# EAGLE board Netzteil-Treiber2 (EAGLE 6.2)
Treiberstufe für Linearen Spannungs- und Stomregler mit OP
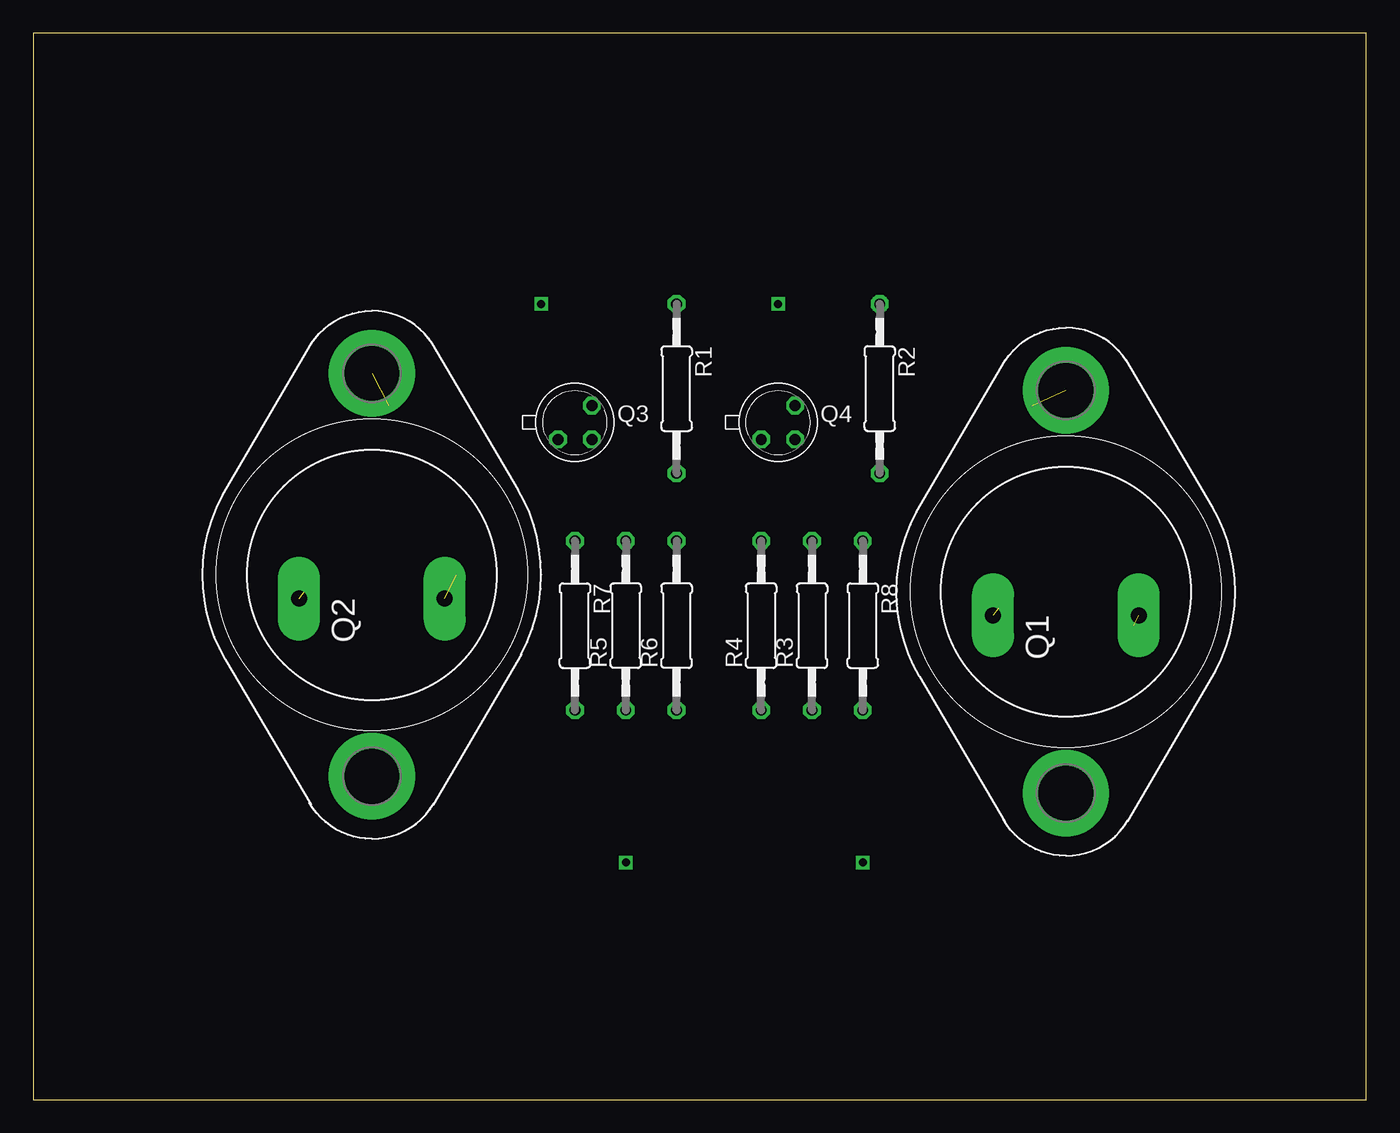
[diagram p0: board, top side]
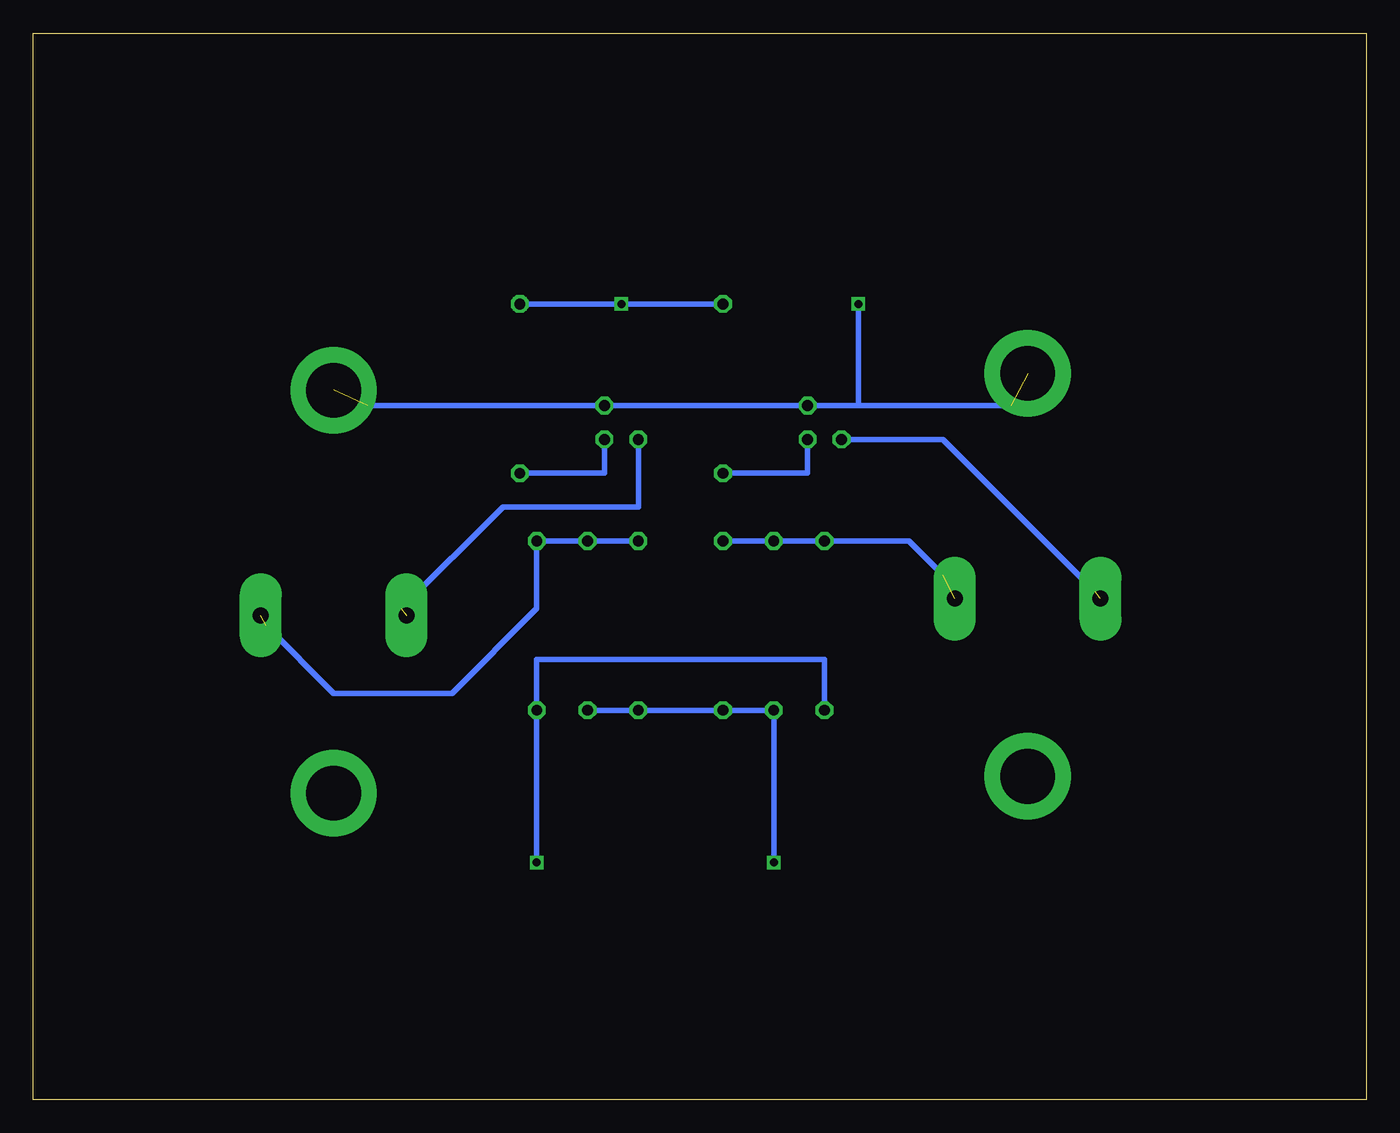
[diagram p1: board, bottom side, seen from below]

Size 100 x 80 mm. Coordinates in mm from the lower left corner, seen from the top.
Outline: 0,0 100,0 100,80 0,80 0,0
Copper layers (1*16): Top 0.035mm / dielectric 1.5mm / Bottom 0.035mm
Design rules: minimum track width 10mil, minimum drill 24mil, track to track 8mil, track to pad 8mil, pad to pad 8mil, via to via 8mil, smd to smd 8mil, copper to edge 40mil, drill to drill 8mil, minimum pad ring 10mil, minimum via ring 8mil, stop-mask expansion 4mil, vias tented up to drill 0mil, thermal gap 10mil

## Footprints (pad centres in the part's own frame; a part is rotated, then mirrored left to right if it is on the bottom)
TO3 = drill 1.194 pad 3.15 long: B -1.778,5.461; E -1.778,-5.461 | drill 4.115 pad 6.477: C 15.113,0; C/ -15.113,0
TO18 = drill 0.813 octagon: 1 -1.27,-1.27; 2 1.27,-1.27; 3 1.27,1.27
0207/12 = drill 0.813 octagon: 1 -6.35,0; 2 6.35,0

## Placement (x,y rotation side)
Q1  2N3055  [TO3]  77.47,38.1 90 top
Q2  2N3055  [TO3]  25.4,39.37 90 top
Q3  2N2222  [TO18]  40.64,50.8 0 top
Q4  2N2222  [TO18]  55.88,50.8 0 top
R1  470  [0207/12]  48.26,53.34 270 top
R2  470  [0207/12]  63.5,53.34 270 top
R3  1  [0207/12]  58.42,35.56 90 top
R4  1  [0207/12]  54.61,35.56 90 top
R5  1  [0207/12]  44.45,35.56 90 top
R6  1  [0207/12]  48.26,35.56 90 top
R7  1k  [0207/12]  40.64,35.56 270 top
R8  1k  [0207/12]  62.23,35.56 270 top

## Library data of the parts
Q1-Q4 = transistor-npn
R1-R8 = resistor

## Nets
CONTROL: R1.1 R2.1
INPUT+: Q1.C Q2.C Q3.3 Q4.3
MC: R7.2 R8.2
N$1: Q3.2 R1.2
N$2: Q4.2 R2.2
N$3: Q1.E R3.2 R4.2 R8.1
N$5: Q1.B Q4.1
N$7: Q2.B Q3.1
N$12: Q2.E R5.2 R6.2 R7.1
OUTPUT+: R3.1 R4.1 R5.1 R6.1

## Tracks (layer width: path | path; a pad name or v marks a point on that pad's centre or on a via)
CONTROL  (via drill 0.6)
  Bottom 0.406: R1.1 v55.88,59.69 R2.1
  other vias: 63.5,59.69
INPUT+  (via drill 0.6)  (2 unrouted)
  Bottom 0.406: 74.93,52.07 Q4.3 Q3.3 38.1,52.07 | 26.67,52.07 38.1,52.07 | 38.1,52.07 v38.1,59.69
MC  (via drill 0.6)
  Bottom 0.406: R7.2 40.64,33.02 62.23,33.02 R8.2 v62.23,17.78
N$1
  Bottom 0.406: R1.2 41.91,46.99 Q3.2
N$2
  Bottom 0.406: Q4.2 57.15,46.99 R2.2
N$3  (1 unrouted)
  Bottom 0.406: R4.2 R3.2 R8.1 62.23,36.83 68.58,30.48 77.47,30.48 82.55,35.56
N$5  (1 unrouted)
  Bottom 0.406: 72.39,36.83 64.77,44.45 54.61,44.45 Q4.1
N$7  (1 unrouted)
  Bottom 0.406: Q3.1 31.75,49.53 20.32,38.1
N$12  (1 unrouted)
  Bottom 0.406: 31.75,39.37 34.29,41.91 R7.1 R5.2 R6.2
OUTPUT+  (via drill 0.6)
  Bottom 0.406: R3.1 R4.1 R6.1 R5.1 v44.45,17.78